# Altium PCB PCB3.PcbDoc (part 2 of 2)
Units mm, origin at the board's own origin, x right, y up, seen from the top; angles counter-clockwise.
Board outline 152.4 x 101.6 mm, 4 copper layers (Top Layer, Int1 (GND), Layer 1, Bottom Layer), stack 1.237 mm thick; 184 components, 352 nets, 1100 pads, 26 vias.
Unrouted connection lines stored in the file: 656.
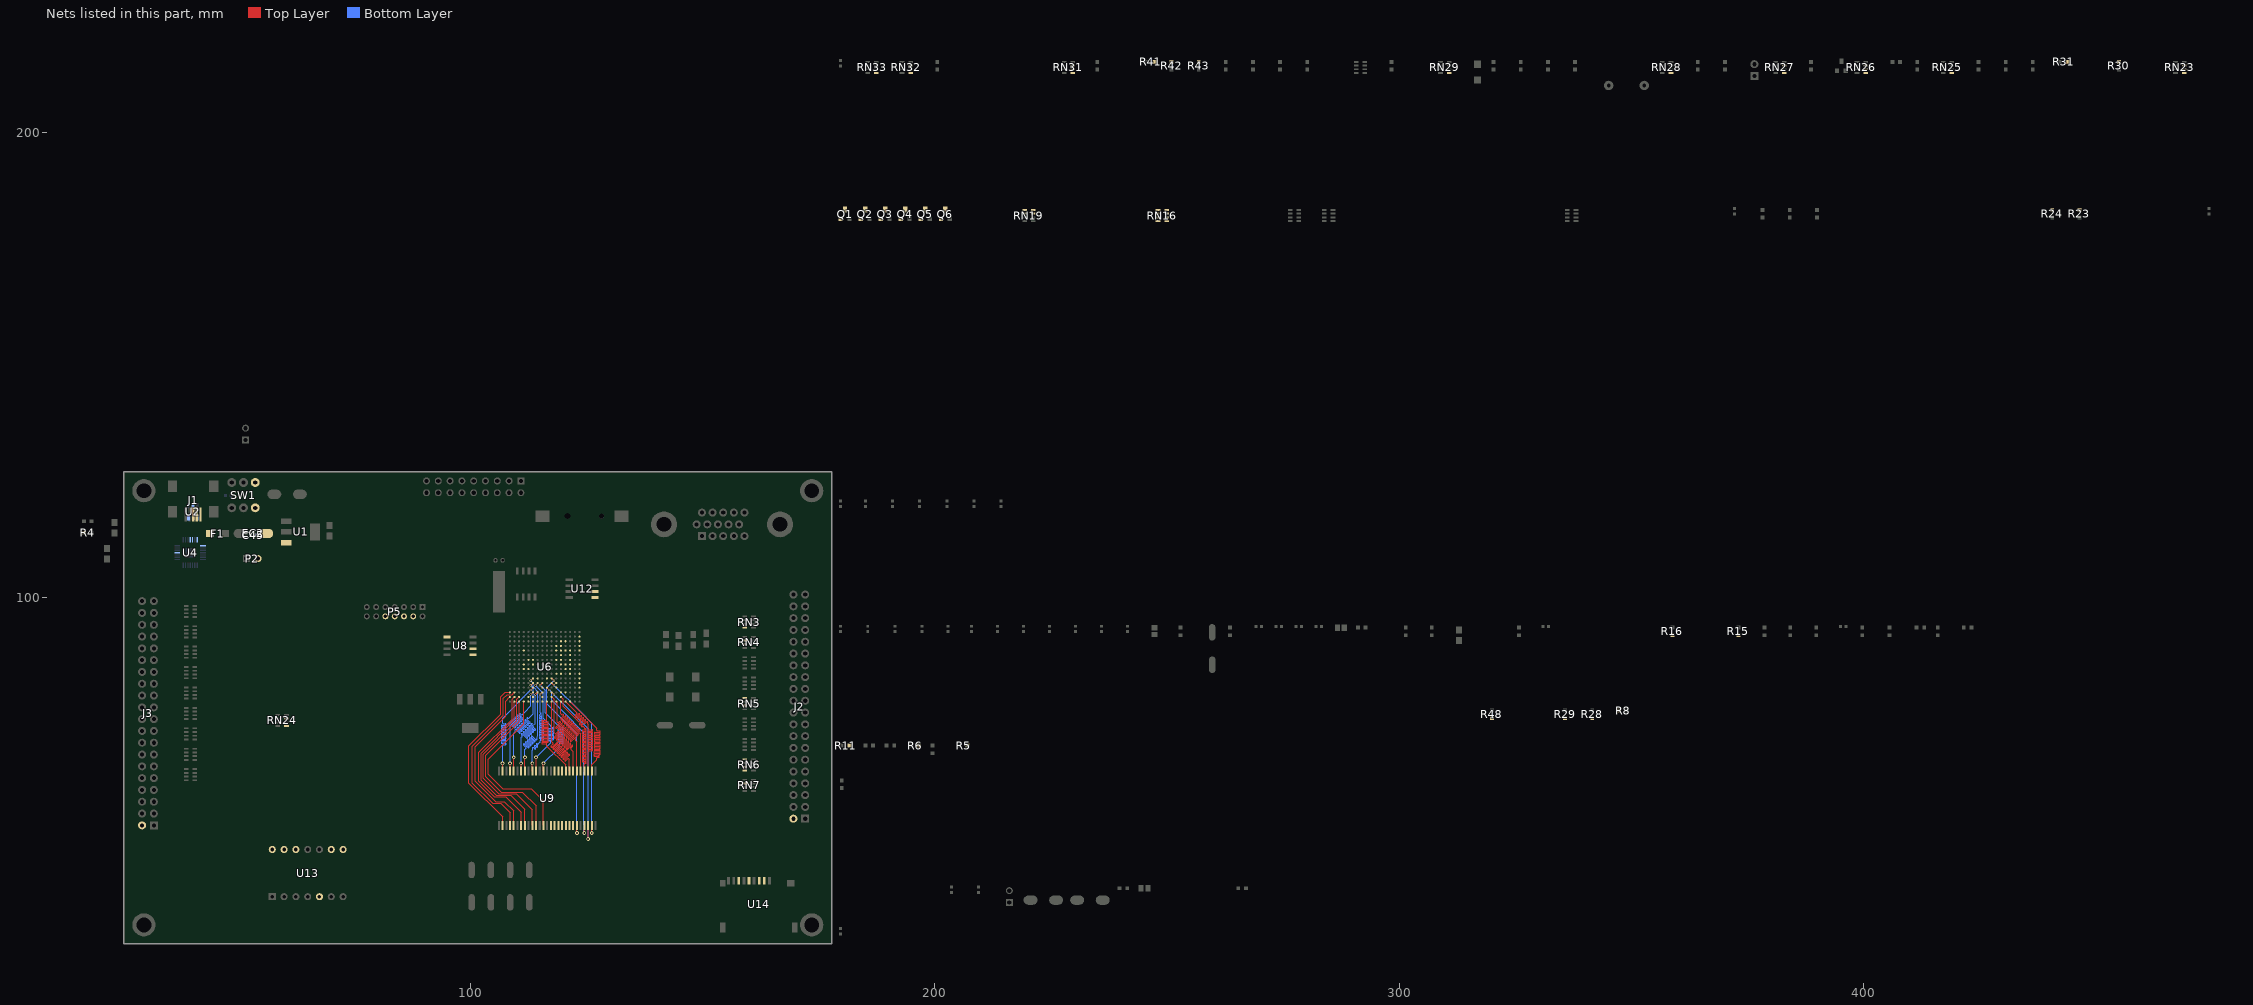
[diagram p3: the nets of this part, all layers, seen from the top]

## Via types
v1: diameter 0.8, hole 0.4, Top Layer to Bottom Layer, 13 vias
v2: diameter 0.48, hole 0.25, Top Layer to Bottom Layer, 13 vias

## Nets (pads, with @x,y where several pads share a name; then routed paths per layer and width w, separated by ;. In a path a pad name is that pad's centre, name@x,y a point inside that pad or via, vN(x,y) a via of type N, cw(c..) or ccw(c..) an arc to the next point about the centre after c; other vN are vias at no path point) (continued)
S_A1: U6.J4 U9.24 | length 36.6
  Top Layer w0.1: U6.J4@116.491,80.534 v2(116.983,80.042)
  Top Layer w0.15: v1(124.536,49.251) U9.24@124.535,50.902
  Bottom Layer w0.15: v2(116.983,80.042) 117.475,79.55 117.475,77.826 119.892,75.409 124.447,70.853 124.447,49.339 v1(124.536,49.251) v1@124.536,48.881
S_A2: U6.K3 U9.25 | length 37.8
  Top Layer w0.1: U6.K3@117.491,79.534 v2(117.983,79.042)
  Top Layer w0.15: U9.25@125.342,50.895 125.342,47.962 v1(125.349,47.955)
  Bottom Layer w0.15: v2(117.983,79.042) 121.616,75.409 125.349,71.676 v1(125.349,47.955)
S_A3: U6.K5 U9.26 | length 37.5
  Top Layer w0.1: U6.K5@117.491,81.534 v2(117.983,81.042)
  Top Layer w0.15: v1(126.136,49.251) U9.26@126.135,50.902
  Bottom Layer w0.15: v2(117.983,81.042) 123.616,75.409 126.136,72.889 v1(126.136,49.251)
S_A4: U6.P1 U9.29 | length 39.9
  Top Layer w0.15: U6.P1@121.491,77.534 127.203,71.822 127.203,71.45 127.203,71.375 ccw(c127.353,71.375) 127.353,71.225 127.812,71.225 cw(c127.812,71.075) 127.812,70.925 126.817,70.925 ccw(c126.817,70.775) 126.817,70.625 127.812,70.625 cw(c127.812,70.475) 127.812,70.325 126.817,70.325 ccw(c126.817,70.175) 126.817,70.025 127.812,70.025 cw(c127.812,69.875) 127.812,69.725 126.817,69.725 ccw(c126.817,69.575) 126.817,69.425 127.812,69.425 cw(c127.812,69.275) 127.812,69.125 126.817,69.125 ccw(c126.817,68.975) 126.817,68.825 127.812,68.825 cw(c127.812,68.675) 127.812,68.525 126.817,68.525 ccw(c126.817,68.375) 126.817,68.225 127.812,68.225 cw(c127.812,68.075) 127.812,67.925 126.817,67.925 ccw(c126.817,67.775) 126.817,67.625 127.812,67.625 cw(c127.812,67.475) 127.812,67.325 126.817,67.325 ccw(c126.817,67.175) 126.817,67.025 127.812,67.025 cw(c127.812,66.875) 127.812,66.725 126.718,66.725 ccw(c126.718,66.575) 126.718,66.425 127.812,66.425 cw(c127.812,66.275) 127.812,66.125 126.718,66.125 ccw(c126.718,65.975) 126.718,65.825 127.569,65.825 cw(c127.569,65.675) 127.569,65.525 127.353,65.525 ccw(c127.353,65.375) 127.203,65.375 127.203,65.049 126.135,63.982 U9.29@126.135,62.586
S_A5: U6.N1 U9.30 | length 39.8
  Top Layer w0.15: U6.N1@120.491,77.534 122.647,75.378 122.912,75.113 cw(c122.806,75.007) 122.912,74.9 122.584,74.572 ccw(c122.69,74.466) 122.584,74.36 ccw(c122.69,74.466) 122.796,74.36 123.337,74.9 cw(c123.443,74.794) 123.549,74.9 cw(c123.443,74.794) 123.549,74.688 123.008,74.148 ccw(c123.114,74.042) 123.008,73.936 ccw(c123.114,74.042) 123.22,73.936 123.761,74.476 cw(c123.867,74.37) 123.973,74.476 cw(c123.867,74.37) 123.973,74.264 123.601,73.892 ccw(c123.707,73.786) 123.601,73.68 ccw(c123.707,73.786) 123.813,73.68 124.185,74.052 cw(c124.291,73.946) 124.397,74.052 cw(c124.291,73.946) 124.397,73.84 124.069,73.512 ccw(c124.175,73.405) 124.069,73.299 ccw(c124.175,73.405) 124.281,73.299 124.609,73.628 cw(c124.715,73.522) 124.822,73.628 cw(c124.715,73.522) 124.822,73.416 124.493,73.087 ccw(c124.599,72.981) 124.493,72.875 ccw(c124.599,72.981) 124.705,72.875 125.034,73.203 cw(c125.14,73.097) 125.246,73.203 cw(c125.14,73.097) 125.246,72.991 ccw(c125.352,72.885) 125.246,72.779 125.335,72.69 125.335,72.524 125.335,72.388 125.335,71.653 ccw(c125.485,71.653) 125.485,71.503 126.217,71.503 cw(c126.217,71.353) 126.217,71.203 125.424,71.203 ccw(c125.424,71.053) 125.424,70.903 126.217,70.903 cw(c126.217,70.753) 126.217,70.603 125.424,70.603 ccw(c125.424,70.453) 125.424,70.303 126.217,70.303 cw(c126.217,70.153) 126.217,70.003 125.424,70.003 ccw(c125.424,69.853) 125.424,69.703 126.217,69.703 cw(c126.217,69.553) 126.217,69.403 125.424,69.403 ccw(c125.424,69.253) 125.424,69.103 126.217,69.103 cw(c126.217,68.953) 126.217,68.803 125.424,68.803 ccw(c125.424,68.653) 125.424,68.503 126.217,68.503 cw(c126.217,68.353) 126.217,68.203 125.424,68.203 ccw(c125.424,68.053) 125.424,67.903 126.217,67.903 cw(c126.217,67.753) 126.217,67.603 125.424,67.603 ccw(c125.424,67.453) 125.424,67.303 126.217,67.303 cw(c126.217,67.153) 126.217,67.003 125.485,67.003 ccw(c125.485,66.853) 125.335,66.853 125.335,66.478 U9.30@125.335,62.586
S_A6: U6.M2 U9.31 | length 38.9
  Top Layer w0.15: U6.M2@119.491,78.534 119.99,78.035 119.99,76.53 123.234,73.286 123.287,73.233 ccw(c123.393,73.339) 123.499,73.233 cw(c123.605,73.127) 123.711,73.233 cw(c123.605,73.127) 123.711,73.021 123.499,72.809 ccw(c123.605,72.703) 123.499,72.597 ccw(c123.605,72.703) 123.711,72.597 123.923,72.809 cw(c124.029,72.703) 124.135,72.809 cw(c124.029,72.703) 124.135,72.597 123.923,72.384 ccw(c124.029,72.278) 123.923,72.172 ccw(c124.029,72.278) 124.135,72.172 cw(c124.225,71.932) 124.406,72.114 124.475,72.045 124.528,71.992 124.535,71.984 124.535,71.962 124.535,71.887 ccw(c124.685,71.887) 124.685,71.737 124.824,71.737 cw(c124.824,71.587) 124.824,71.437 124.225,71.437 ccw(c124.225,71.287) 124.225,71.137 124.824,71.137 cw(c124.824,70.987) 124.824,70.837 124.225,70.837 ccw(c124.225,70.687) 124.225,70.537 124.824,70.537 cw(c124.824,70.387) 124.824,70.237 124.225,70.237 ccw(c124.225,70.087) 124.225,69.937 124.824,69.937 cw(c124.824,69.787) 124.824,69.637 124.225,69.637 ccw(c124.225,69.487) 124.225,69.337 124.824,69.337 cw(c124.824,69.187) 124.824,69.037 124.225,69.037 ccw(c124.225,68.887) 124.225,68.737 124.824,68.737 cw(c124.824,68.587) 124.824,68.437 124.225,68.437 ccw(c124.225,68.287) 124.225,68.137 124.824,68.137 cw(c124.824,67.987) 124.824,67.837 124.225,67.837 ccw(c124.225,67.687) 124.225,67.537 124.824,67.537 cw(c124.824,67.387) 124.824,67.237 124.225,67.237 ccw(c124.225,67.087) 124.225,66.937 124.824,66.937 cw(c124.824,66.787) 124.824,66.637 124.225,66.637 ccw(c124.225,66.487) 124.225,66.337 124.824,66.337 cw(c124.824,66.187) 124.824,66.037 124.225,66.037 ccw(c124.225,65.887) 124.225,65.737 124.824,65.737 cw(c124.824,65.587) 124.824,65.437 124.225,65.437 ccw(c124.225,65.287) 124.225,65.137 124.824,65.137 cw(c124.824,64.987) 124.824,64.837 124.225,64.837 ccw(c124.225,64.687) 124.225,64.537 124.824,64.537 cw(c124.824,64.387) 124.824,64.237 124.685,64.237 ccw(c124.685,64.087) 124.535,64.087 124.535,63.856 U9.31@124.535,62.586
S_A7: U6.M1 U9.32 | length 39.9
  Top Layer w0.15: 119.451,73.694 ccw(c119.557,73.8) 119.663,73.694 ; 119.451,73.694 cw(c119.557,73.8) 119.451,73.906 120.072,74.527 ccw(c119.966,74.633) 120.072,74.739 ccw(c119.966,74.633) 119.86,74.739 cw(c119.754,74.845) 119.647,74.739 119.491,74.895 119.491,75.203 U6.M1@119.491,77.534 ; 119.663,73.694 120.393,74.424 cw(c120.499,74.318) 120.605,74.424 cw(c120.499,74.318) 120.605,74.212 119.787,73.394 ccw(c119.893,73.288) 119.787,73.181 ccw(c119.893,73.288) 119.999,73.181 120.817,73.999 cw(c120.923,73.893) 121.029,73.999 cw(c120.923,73.893) 121.029,73.787 120.212,72.969 ccw(c120.318,72.863) 120.212,72.757 ccw(c120.318,72.863) 120.424,72.757 121.242,73.575 cw(c121.348,73.469) 121.454,73.575 cw(c121.348,73.469) 121.454,73.363 120.636,72.545 ccw(c120.742,72.439) 120.636,72.333 ccw(c120.742,72.439) 120.848,72.333 121.666,73.151 cw(c121.772,73.045) 121.878,73.151 cw(c121.772,73.045) 121.878,72.939 121.06,72.121 ccw(c121.166,72.015) 121.06,71.909 ccw(c121.166,72.015) 121.272,71.909 122.09,72.727 cw(c122.196,72.621) 122.302,72.727 cw(c122.196,72.621) 122.302,72.514 121.484,71.697 ccw(c121.59,71.59) 121.484,71.484 ccw(c121.59,71.59) 121.696,71.484 122.514,72.302 cw(c122.62,72.196) 122.727,72.302 cw(c122.62,72.196) 122.727,72.09 121.909,71.272 ccw(c122.015,71.166) 121.909,71.06 ccw(c122.015,71.166) 122.121,71.06 122.939,71.878 cw(c123.045,71.772) 123.151,71.878 cw(c123.045,71.772) 123.151,71.666 122.333,70.848 ccw(c122.439,70.742) 122.333,70.636 ccw(c122.439,70.742) 122.545,70.636 123.363,71.454 cw(c123.469,71.348) 123.575,71.454 cw(c123.469,71.348) 123.575,71.242 122.757,70.424 ccw(c122.863,70.318) 122.757,70.212 ccw(c122.863,70.318) 122.969,70.212 123.466,70.708 cw(c123.572,70.602) 123.678,70.708 123.731,70.655 123.735,70.651 U9.32@123.735,62.586
S_A8: U6.L1 U9.33 | length 39
  Top Layer w0.15: U6.L1@118.491,77.534 118.745,77.28 118.745,73.106 118.745,73.101 118.796,73.051 ccw(c118.902,73.157) 119.008,73.051 119.152,73.195 cw(c119.258,73.089) 119.364,73.195 cw(c119.258,73.089) 119.364,72.983 118.428,72.047 ccw(c118.534,71.941) 118.428,71.835 ccw(c118.534,71.941) 118.64,71.835 119.576,72.771 cw(c119.683,72.665) 119.789,72.771 cw(c119.682,72.665) 119.789,72.559 118.944,71.714 ccw(c119.05,71.608) 118.944,71.502 ccw(c119.05,71.608) 119.156,71.502 120.001,72.347 cw(c120.107,72.241) 120.213,72.347 cw(c120.107,72.241) 120.213,72.135 119.407,71.329 ccw(c119.514,71.223) 119.407,71.117 ccw(c119.514,71.223) 119.62,71.117 120.425,71.922 cw(c120.531,71.816) 120.637,71.922 cw(c120.531,71.816) 120.637,71.71 119.832,70.905 ccw(c119.938,70.799) 119.832,70.693 ccw(c119.938,70.799) 120.044,70.693 120.849,71.498 cw(c120.955,71.392) 121.061,71.498 cw(c120.955,71.392) 121.061,71.286 120.256,70.481 ccw(c120.362,70.375) 120.256,70.269 ccw(c120.362,70.375) 120.468,70.269 121.273,71.074 cw(c121.38,70.968) 121.486,71.074 cw(c121.38,70.968) 121.486,70.862 120.68,70.056 ccw(c120.786,69.95) 120.68,69.844 ccw(c120.786,69.95) 120.892,69.844 121.698,70.65 cw(c121.804,70.544) 121.91,70.65 cw(c121.804,70.544) 121.91,70.437 121.105,69.632 ccw(c121.211,69.526) 121.105,69.42 ccw(c121.211,69.526) 121.317,69.42 122.122,70.225 cw(c122.228,70.119) 122.334,70.225 cw(c122.228,70.119) 122.334,70.013 121.529,69.208 ccw(c121.635,69.102) 121.529,68.996 ccw(c121.635,69.102) 121.741,68.996 122.546,69.801 cw(c122.652,69.695) 122.758,69.801 cw(c122.652,69.695) 122.758,69.589 122.614,69.444 ccw(c122.72,69.338) 122.614,69.232 122.935,68.911 122.935,68.886 U9.33@122.935,62.586
S_A9: U6.K2 U9.34 | length 39.5
  Top Layer w0.15: U6.K2@117.491,78.534 118.008,78.017 118.008,70.942 118.204,70.747 118.257,70.694 ccw(c118.363,70.8) 118.469,70.694 118.832,71.057 cw(c118.938,70.95) 119.044,71.057 cw(c118.938,70.95) 119.044,70.844 118.119,69.92 ccw(c118.225,69.814) 118.119,69.708 ccw(c118.225,69.814) 118.331,69.708 119.256,70.632 cw(c119.362,70.526) 119.468,70.632 cw(c119.362,70.526) 119.468,70.42 118.544,69.496 ccw(c118.65,69.39) 118.544,69.283 ccw(c118.65,69.39) 118.756,69.283 119.68,70.208 cw(c119.786,70.102) 119.892,70.208 cw(c119.786,70.102) 119.892,69.996 118.997,69.101 ccw(c119.103,68.995) 118.997,68.889 ; 118.997,68.889 ccw(c119.103,68.995) 119.209,68.889 120.104,69.784 cw(c120.21,69.678) 120.317,69.784 cw(c120.21,69.678) 120.317,69.572 119.421,68.676 ccw(c119.527,68.57) 119.421,68.464 ccw(c119.527,68.57) 119.633,68.464 120.529,69.359 cw(c120.635,69.253) 120.741,69.359 cw(c120.635,69.253) 120.741,69.147 119.846,68.252 ccw(c119.952,68.146) 119.846,68.04 ccw(c119.952,68.146) 120.058,68.04 120.953,68.935 cw(c121.059,68.829) 121.165,68.935 cw(c121.059,68.829) 121.165,68.723 120.27,67.828 ccw(c120.376,67.722) 120.27,67.616 ccw(c120.376,67.722) 120.482,67.616 121.377,68.511 cw(c121.483,68.405) 121.589,68.511 cw(c121.483,68.405) 121.589,68.299 120.694,67.404 ccw(c120.8,67.298) 120.694,67.191 ccw(c120.8,67.298) 120.906,67.191 121.801,68.087 cw(c121.908,67.981) 122.014,68.087 cw(c121.908,67.981) 122.014,67.875 121.651,67.512 ccw(c121.757,67.406) 121.651,67.3 121.945,67.005 122.137,66.813 U9.34@122.137,62.586
S_A10: U6.K6 U9.22 | length 38.5
  Top Layer w0.1: U6.K6@117.491,82.534 v2(117.983,82.042)
  Top Layer w0.15: v1(122.936,49.251) U9.22@122.935,50.902
  Bottom Layer w0.15: v2(117.983,82.042) 116.408,80.467 116.408,77.038 118.037,75.409 122.936,70.51 v1(122.936,49.251)
S_A11: U6.K1 U9.35 | length 39
  Top Layer w0.15: U6.K1@117.491,77.534 117.491,68.869 117.496,68.864 117.781,68.579 cw(c117.675,68.473) 117.781,68.367 117.389,67.976 ccw(c117.495,67.869) 117.389,67.763 ccw(c117.495,67.869) 117.602,67.763 118.544,68.706 cw(c118.65,68.599) 118.756,68.706 cw(c118.65,68.599) 118.756,68.493 117.814,67.551 ccw(c117.92,67.445) 117.814,67.339 ccw(c117.92,67.445) 118.026,67.339 118.968,68.281 cw(c119.074,68.175) 119.18,68.281 cw(c119.074,68.175) 119.18,68.069 118.238,67.127 ccw(c118.344,67.021) 118.238,66.915 ccw(c118.344,67.021) 118.45,66.915 119.392,67.857 cw(c119.498,67.751) 119.604,67.857 cw(c119.498,67.751) 119.604,67.645 118.662,66.703 ccw(c118.768,66.597) 118.662,66.491 ccw(c118.768,66.597) 118.874,66.491 119.816,67.433 cw(c119.923,67.327) 120.029,67.433 cw(c119.923,67.327) 120.029,67.221 119.086,66.278 ccw(c119.193,66.172) 119.086,66.066 ccw(c119.193,66.172) 119.299,66.066 120.241,67.008 cw(c120.347,66.902) 120.453,67.008 cw(c120.347,66.902) 120.453,66.796 119.511,65.854 ccw(c119.617,65.748) 119.511,65.642 ccw(c119.617,65.748) 119.723,65.642 120.665,66.584 cw(c120.771,66.478) 120.877,66.584 cw(c120.771,66.478) 120.877,66.372 119.935,65.43 ccw(c120.041,65.324) 119.935,65.218 ccw(c120.041,65.324) 120.147,65.218 121.089,66.16 cw(c121.195,66.054) 121.301,66.16 cw(c121.195,66.054) 121.301,65.948 120.359,65.006 ccw(c120.465,64.9) 120.359,64.794 ccw(c120.465,64.9) 120.571,64.794 120.963,65.185 cw(c121.069,65.079) 121.175,65.185 121.228,65.132 121.335,65.024 U9.35@121.335,62.586
S_A12: U6.J1 U9.36 | length 39.5
  Top Layer w0.15: U6.J1@116.491,77.534 116.491,74.498 116.491,73.699 cw(c116.341,73.699) 116.341,73.549 115.51,73.549 ccw(c115.51,73.399) 115.51,73.249 116.641,73.249 cw(c116.641,73.099) 116.641,72.949 115.51,72.949 ccw(c115.51,72.799) 115.51,72.649 116.641,72.649 cw(c116.641,72.499) 116.641,72.349 115.51,72.349 ccw(c115.51,72.199) 115.51,72.049 116.641,72.049 cw(c116.641,71.899) 116.641,71.749 115.51,71.749 ccw(c115.51,71.599) 115.51,71.449 116.641,71.449 cw(c116.641,71.299) 116.641,71.149 115.51,71.149 ccw(c115.51,70.999) 115.51,70.849 116.641,70.849 cw(c116.641,70.699) 116.641,70.549 115.51,70.549 ccw(c115.51,70.399) 115.51,70.249 116.641,70.249 cw(c116.641,70.099) 116.641,69.949 115.51,69.949 ccw(c115.51,69.799) 115.51,69.649 116.641,69.649 cw(c116.641,69.499) 116.641,69.349 115.51,69.349 ccw(c115.51,69.199) 115.51,69.049 116.641,69.049 cw(c116.641,68.899) 116.641,68.749 115.51,68.749 ccw(c115.51,68.599) 115.51,68.449 116.341,68.449 cw(c116.341,68.299) 116.491,68.299 116.491,68.224 116.491,67.938 120.535,63.894 U9.36@120.535,62.586
S_BA0: U6.G6 U9.20
S_BA1: U6.J6 U9.21
S_CKE: U6.H2 U9.37
S_CLK: U6.H4 U9.38
S_DB0: U6.A3 U9.2 | length 35.9
  Top Layer w0.15: U9.2@106.935,50.902 106.935,52.729 99.67,59.995 99.67,67.996 106.502,74.828 106.502,74.854 106.502,78.562 107.474,79.534 U6.A3@108.491,79.534
S_DB1: U6.B3 U9.4 | length 37.4
  Top Layer w0.15: U9.4@108.535,50.902 108.535,53.618 106.493,55.661 104.765,55.661 100.432,59.995 100.432,67.932 107.086,74.586 107.086,74.854 107.086,78.232 107.899,79.045 109.002,79.045 U6.B3@109.491,79.534
S_DB2: U6.A2 U9.5 | length 35.3
  Top Layer w0.15: U6.A2@108.491,78.534 107.594,77.637 107.594,74.854 107.594,74.376 101.041,67.823 101.041,60.401 105.422,56.02 107.302,56.02 109.335,53.987 U9.5@109.335,50.902
S_DB3: U6.B2 U9.7 | length 36
  Top Layer w0.15: U6.B2@109.491,78.534 109.007,78.05 109.007,74.854 109.007,73.791 101.809,66.592 101.809,60.396 105.185,57.019 107.649,57.019 110.935,53.733 U9.7@110.935,50.902
S_DB4: U6.B1 U9.8 | length 35.4
  Top Layer w0.15: U6.B1@109.491,77.534 109.491,74.854 109.491,73.59 102.292,66.392 102.292,60.623 105.554,57.361 108.729,57.361 111.735,54.355 U9.8@111.735,50.902
S_DB5: U6.C2 U9.10 | length 37.3
  Top Layer w0.15: U6.C2@110.491,78.534 110.007,78.05 110.007,74.854 110.007,73.376 102.809,66.178 102.809,61.072 106.154,57.727 109.837,57.727 113.335,54.228 U9.10@113.335,50.902
S_DB6: U6.C1 U9.11 | length 36.8
  Top Layer w0.15: U6.C1@110.491,77.534 110.491,74.854 110.491,73.176 103.292,65.978 103.292,61.376 106.6,58.068 111.172,58.068 114.136,55.104 U9.11@114.136,50.902
S_DB7: U6.D1 U9.13 | length 38.3
  Top Layer w0.15: U6.D1@111.491,77.534 111.491,74.854 111.491,72.762 103.81,65.081 103.81,61.951 106.985,58.776 113.106,58.776 115.735,56.146 U9.13@115.735,50.902
S_DB8: U6.H5 U9.42 | length 34.4
  Top Layer w0.1: v2(114.999,81.042) U6.H5@115.491,81.534
  Top Layer w0.15: U9.42@115.735,62.586 v1(115.736,64.236)
  Bottom Layer w0.15: v2(114.999,81.042) 116.108,79.933 116.108,75.128 119.151,72.085 119.151,72.01 ccw(c119.301,72.01) 119.301,71.86 119.892,71.86 cw(c119.892,71.71) 119.892,71.56 119.001,71.56 ccw(c119.001,71.41) 119.001,71.26 119.892,71.26 cw(c119.892,71.11) 119.892,70.96 119.001,70.96 ccw(c119.001,70.81) 119.001,70.66 119.892,70.66 cw(c119.892,70.51) 119.892,70.36 119.001,70.36 ccw(c119.001,70.21) 119.001,70.06 119.892,70.06 cw(c119.892,69.91) 119.892,69.76 119.001,69.76 ccw(c119.001,69.61) 119.001,69.46 119.892,69.46 cw(c119.892,69.31) 119.892,69.16 119.001,69.16 ccw(c119.001,69.01) 119.001,68.86 119.892,68.86 cw(c119.892,68.71) 119.892,68.56 119.301,68.56 ccw(c119.301,68.41) 119.151,68.41 119.151,67.945 119.151,67.652 v1(115.736,64.236)
S_DB9: U6.G5 U9.44 | length 33.6
  Top Layer w0.1: v2(113.999,81.042) U6.G5@114.491,81.534
  Top Layer w0.15: U9.44@114.136,62.586 114.142,62.592 114.142,65.525 v1(114.149,65.532)
  Bottom Layer w0.15: v2(113.999,81.042) 115.697,79.344 115.697,73.939 117.272,72.365 117.272,72.288 117.272,72.213 ccw(c117.422,72.213) 117.422,72.063 117.792,72.063 cw(c117.792,71.913) 117.792,71.763 116.77,71.763 ccw(c116.77,71.613) 116.77,71.463 117.792,71.463 cw(c117.792,71.313) 117.792,71.163 116.77,71.163 ccw(c116.77,71.013) 116.77,70.863 117.792,70.863 cw(c117.792,70.713) 117.792,70.563 116.77,70.563 ccw(c116.77,70.413) 116.77,70.263 117.792,70.263 cw(c117.792,70.113) 117.792,69.963 116.77,69.963 ccw(c116.77,69.813) 116.77,69.663 117.792,69.663 cw(c117.792,69.513) 117.792,69.363 116.77,69.363 ccw(c116.77,69.213) 116.77,69.063 117.122,69.063 cw(c117.122,68.913) 117.272,68.913 117.272,68.655 117.16,68.543 v1(114.149,65.532)
S_DB10: U6.H3 U9.45 | length 34.7
  Top Layer w0.1: v2(114.999,79.042) U6.H3@115.491,79.534
  Top Layer w0.15: U9.45@113.335,62.586 v1(113.336,64.237)
  Bottom Layer w0.15: v1(113.336,64.237) 113.336,67.108 113.389,67.161 ccw(c113.283,67.267) 113.389,67.373 cw(c113.495,67.479) 113.389,67.585 cw(c113.495,67.479) 113.601,67.585 113.813,67.373 ccw(c113.919,67.479) 114.025,67.373 ccw(c113.919,67.479) 114.025,67.585 113.813,67.797 cw(c113.919,67.904) 113.813,68.01 cw(c113.919,67.904) 114.025,68.01 114.238,67.797 ccw(c114.344,67.904) 114.45,67.797 ccw(c114.344,67.904) 114.45,68.01 114.238,68.222 cw(c114.344,68.328) 114.238,68.434 cw(c114.344,68.328) 114.45,68.434 ccw(c114.556,68.54) 114.662,68.434 114.967,68.739 114.999,68.771 114.999,69.146 cw(c115.149,69.146) 115.149,69.296 115.695,69.296 ccw(c115.695,69.446) 115.695,69.596 114.951,69.596 cw(c114.951,69.746) 114.951,69.896 115.695,69.896 ccw(c115.695,70.046) 115.695,70.196 114.984,70.196 cw(c114.984,70.346) 114.984,70.496 115.695,70.496 ccw(c115.695,70.646) 115.695,70.796 114.984,70.796 cw(c114.984,70.946) 114.984,71.096 115.695,71.096 ccw(c115.695,71.246) 115.695,71.396 114.984,71.396 cw(c114.984,71.546) 114.984,71.696 115.695,71.696 ccw(c115.695,71.846) 115.695,71.996 114.984,71.996 cw(c114.984,72.146) 114.984,72.296 115.695,72.296 ccw(c115.695,72.446) 115.695,72.596 114.984,72.596 cw(c114.984,72.746) 114.984,72.896 115.695,72.896 ccw(c115.695,73.046) 115.695,73.196 114.984,73.196 cw(c114.984,73.346) 114.984,73.496 115.283,73.496 ccw(c115.283,73.646) 115.283,73.796 114.984,73.796 cw(c114.984,73.946) 114.984,74.096 115.247,74.096 ccw(c115.247,74.246) 115.247,74.396 114.984,74.396 cw(c114.984,74.546) 114.984,74.696 115.162,74.696 ccw(c115.162,74.846) 115.162,74.996 115.149,74.996 cw(c115.149,75.146) 114.999,75.146 114.999,75.409 v2(114.999,79.042)
S_DB11: U6.F6 U9.47 | length 33.6
  Top Layer w0.1: v2(112.999,82.042) U6.F6@113.491,82.534
  Top Layer w0.15: U9.47@111.735,62.586 111.742,62.592 111.742,65.525 v1(111.749,65.532)
  Bottom Layer w0.15: v1(111.749,65.532) 111.749,67.248 111.912,67.412 111.965,67.465 ccw(c111.859,67.571) 111.965,67.677 111.462,68.181 cw(c111.568,68.287) 111.462,68.393 cw(c111.568,68.287) 111.674,68.393 112.39,67.677 ccw(c112.496,67.783) 112.602,67.677 ccw(c112.496,67.783) 112.602,67.889 111.886,68.605 cw(c111.992,68.711) 111.886,68.817 cw(c111.992,68.711) 112.098,68.817 112.814,68.101 ccw(c112.92,68.207) 113.026,68.101 ccw(c112.92,68.207) 113.026,68.313 112.31,69.029 cw(c112.416,69.135) 112.31,69.241 cw(c112.416,69.135) 112.522,69.241 113.238,68.525 ccw(c113.344,68.631) 113.45,68.525 ccw(c113.344,68.631) 113.45,68.737 112.734,69.453 cw(c112.84,69.559) 112.734,69.666 cw(c112.84,69.559) 112.947,69.666 113.662,68.95 ccw(c113.769,69.056) 113.875,68.95 ccw(c113.769,69.056) 113.875,69.162 113.159,69.878 cw(c113.265,69.984) 113.159,70.09 cw(c113.265,69.984) 113.371,70.09 114.087,69.374 ccw(c114.193,69.48) 114.299,69.374 ccw(c114.193,69.48) 114.299,69.586 cw(c114.539,69.676) 114.357,69.856 114.534,70.033 114.534,79.235 114.554,79.255 114.554,79.68 113.533,80.7 113.533,81.508 v2(112.999,82.042)
S_DB12: U6.G3 U9.48 | length 33.6
  Top Layer w0.1: v2(113.999,79.042) U6.G3@114.491,79.534
  Top Layer w0.15: U9.48@110.935,62.586 v1@110.936,64.236
  Bottom Layer w0.15: v1(110.936,64.237) 110.936,69.813 111.087,69.964 111.14,70.017 ccw(c111.034,70.123) 111.14,70.229 110.964,70.405 cw(c111.07,70.511) 110.964,70.617 cw(c111.07,70.511) 111.176,70.617 112.069,69.725 ccw(c112.175,69.831) 112.281,69.725 ccw(c112.175,69.831) 112.281,69.937 111.388,70.83 cw(c111.495,70.936) 111.388,71.042 cw(c111.495,70.936) 111.601,71.042 112.493,70.149 ccw(c112.599,70.255) 112.705,70.149 ccw(c112.599,70.255) 112.705,70.361 111.813,71.254 cw(c111.919,71.36) 111.813,71.466 cw(c111.919,71.36) 112.025,71.466 112.917,70.573 ccw(c113.023,70.68) 113.129,70.573 ccw(c113.023,70.68) 113.129,70.786 112.237,71.678 cw(c112.343,71.784) 112.237,71.89 cw(c112.343,71.784) 112.449,71.89 113.341,70.998 ccw(c113.448,71.104) 113.554,70.998 ccw(c113.448,71.104) 113.554,71.21 112.661,72.102 cw(c112.767,72.208) 112.661,72.314 cw(c112.767,72.208) 112.873,72.314 113.766,71.422 ccw(c113.872,71.528) 113.978,71.422 ccw(c113.872,71.528) 113.978,71.634 113.085,72.527 cw(c113.192,72.633) 113.085,72.739 cw(c113.192,72.633) 113.298,72.739 113.473,72.563 ccw(c113.579,72.669) 113.686,72.563 113.94,72.817 113.999,72.876 v2(113.999,79.042)
S_DB13: U6.F5 U9.50 | length 34.6
  Top Layer w0.1: v2(112.999,81.042) U6.F5@113.491,81.534
  Top Layer w0.15: U9.50@109.336,62.586 109.342,62.592 109.342,65.525 v1(109.349,65.532)
  Bottom Layer w0.15: v1(109.349,65.532) 109.349,70.741 109.576,70.968 109.629,71.021 ccw(c109.523,71.127) 109.629,71.233 cw(c109.735,71.339) 109.629,71.445 cw(c109.735,71.339) 109.841,71.445 110.498,70.788 ccw(c110.604,70.894) 110.71,70.788 ccw(c110.604,70.894) 110.71,71 110.053,71.657 cw(c110.159,71.763) 110.053,71.869 cw(c110.159,71.763) 110.265,71.869 110.922,71.212 ccw(c111.028,71.318) 111.134,71.212 ccw(c111.028,71.318) 111.134,71.424 110.477,72.081 cw(c110.583,72.187) 110.477,72.293 cw(c110.583,72.187) 110.689,72.293 111.347,71.636 ccw(c111.453,71.742) 111.559,71.636 ccw(c111.453,71.742) 111.559,71.848 110.901,72.506 cw(c111.007,72.612) 110.901,72.718 cw(c111.007,72.612) 111.114,72.718 111.771,72.06 ccw(c111.877,72.166) 111.983,72.06 ccw(c111.877,72.166) 111.983,72.273 111.326,72.93 cw(c111.432,73.036) 111.326,73.142 cw(c111.432,73.036) 111.538,73.142 112.195,72.485 ccw(c112.301,72.591) 112.407,72.485 ccw(c112.301,72.591) 112.407,72.697 111.75,73.354 cw(c111.856,73.46) 111.75,73.566 cw(c111.856,73.46) 111.962,73.566 112.619,72.909 ccw(c112.725,73.015) 112.831,72.909 ccw(c112.725,73.015) 112.831,73.121 112.174,73.778 cw(c112.28,73.884) 112.174,73.99 cw(c112.28,73.884) 112.386,73.99 ccw(c112.492,74.097) 112.598,73.99 112.78,74.172 113.487,74.879 113.487,80.289 113.283,80.493 113.283,80.758 v2(112.999,81.042)
S_DB14: U6.F3 U9.51 | length 34.7
  Top Layer w0.1: v2(112.999,79.042) U6.F3@113.491,79.534
  Top Layer w0.15: U9.51@108.536,62.586 v1(108.536,64.237)
  Bottom Layer w0.15: v1(108.536,64.237) 108.536,72.138 108.589,72.191 ccw(c108.483,72.297) 108.589,72.403 108.345,72.647 cw(c108.451,72.754) 108.345,72.86 cw(c108.451,72.754) 108.557,72.86 109.482,71.934 ccw(c109.588,72.041) 109.694,71.934 ccw(c109.588,72.041) 109.694,72.147 108.769,73.072 cw(c108.875,73.178) 108.769,73.284 cw(c108.875,73.178) 108.981,73.284 109.906,72.359 ccw(c110.012,72.465) 110.118,72.359 ccw(c110.012,72.465) 110.118,72.571 109.193,73.496 cw(c109.299,73.602) 109.193,73.708 cw(c109.299,73.602) 109.405,73.708 110.33,72.783 ccw(c110.436,72.889) 110.542,72.783 ccw(c110.436,72.889) 110.542,72.995 109.617,73.92 cw(c109.723,74.026) 109.617,74.132 cw(c109.723,74.026) 109.83,74.132 110.755,73.207 ccw(c110.861,73.313) 110.967,73.207 ccw(c110.861,73.313) 110.967,73.419 110.042,74.344 cw(c110.148,74.451) 110.042,74.557 cw(c110.148,74.451) 110.254,74.557 111.179,73.632 ccw(c111.285,73.738) 111.391,73.632 ccw(c111.285,73.738) 111.391,73.844 110.524,74.711 cw(c110.63,74.817) 110.524,74.923 cw(c110.63,74.817) 110.736,74.923 110.922,74.736 ccw(c111.029,74.842) 111.135,74.736 111.785,75.387 112.999,76.601 v2(112.999,79.042)
S_DB15: U6.F4 U9.53 | length 34.6
  Top Layer w0.1: v2(112.999,80.042) U6.F4@113.491,80.534
  Top Layer w0.15: U9.53@106.935,62.586 v1(106.936,64.236)
  Bottom Layer w0.15: v1(106.936,64.236) 106.936,67.742 106.936,68.117 cw(c107.086,68.117) 107.086,68.267 107.52,68.267 ccw(c107.52,68.417) 107.52,68.567 106.786,68.567 cw(c106.786,68.717) 106.786,68.867 107.52,68.867 ccw(c107.52,69.017) 107.52,69.167 106.786,69.167 cw(c106.786,69.317) 106.786,69.467 107.52,69.467 ccw(c107.52,69.617) 107.52,69.767 106.786,69.767 cw(c106.786,69.917) 106.786,70.067 107.52,70.067 ccw(c107.52,70.217) 107.52,70.367 106.786,70.367 cw(c106.786,70.517) 106.786,70.667 107.52,70.667 ccw(c107.52,70.817) 107.52,70.967 106.786,70.967 cw(c106.786,71.117) 106.786,71.267 107.52,71.267 ccw(c107.52,71.417) 107.52,71.567 106.786,71.567 cw(c106.786,71.717) 106.786,71.867 107.52,71.867 ccw(c107.52,72.017) 107.52,72.167 106.786,72.167 cw(c106.786,72.317) 106.786,72.467 107.52,72.467 ccw(c107.52,72.617) 107.52,72.767 107.086,72.767 cw(c107.086,72.917) 106.936,72.917 106.936,73.558 106.936,73.979 v2(112.999,80.042)
S_DQM0: U6.E2 U9.15
S_DQM1: U6.H1 U9.39
S_nCAS: U6.F2 U9.17
S_nCS: U6.G1 U9.19
S_nRAS: U6.F1 U9.18
S_nWE: U6.E1 U9.16
SCL: R23.2 U6.N12 U12.6
SD_CLK: U6.M3 U14.5
SD_DIN: R43.2 U6.L5 U14.3
SD_DOUT: R41.2 U6.L4 U14.7
SD_NCS: R42.2 U6.N3 U14.2
SDA: R24.2 U6.P12 U12.5
SEL0: RN19.7 U6.D8
SEL0_T: Q6.1 RN19.2
SEL0_TT: Q6.3 U13.5
SEL1: RN19.8 U6.E8
SEL1_T: Q5.1 RN19.1
SEL1_TT: Q5.3 U13.8
SEL2: RN16.5 U6.F9
SEL2_T: Q4.1 RN16.4
SEL2_TT: Q4.3 U13.9
SEL3: RN16.6 U6.F10
SEL3_T: Q3.1 RN16.3
SEL3_TT: Q3.3 U13.12
SEL4: RN16.7 U6.E10
SEL4_T: Q2.1 RN16.2
SEL4_TT: Q2.3 U13.13
SEL5: RN16.8 U6.D9
SEL5_T: Q1.1 RN16.1
SEL5_TT: Q1.3 U13.14
SPI_CLK: R5.2 U8.6
SPI_CS_N: R11.2 R15.1 U8.1
SPI_DIN: R6.2 U8.5
SPI_DOUT: R16.1 U6.P10
T4: RN7.2 U6.T4
T5: RN6.4 U6.T5
T6: RN6.3 U6.T6
T7: RN6.1 U6.T7
T9: RN5.3 U6.T9
T12: RN5.1 U6.T12
T13: RN4.3 U6.T13
T14: RN4.2 U6.T14
T15: RN3.4 U6.T15
TCK: P5.6 R28.1
TDI: P5.10 R48.1
TDO: P5.8 R29.1
TMS: P5.4 R8.1
TXD: R4.1 U4.25 U6.D12
USB_N: J1.2 U2.3 U4.5
USB_P: J1.3 U2.1 U4.4
VBUS: F1.1 J1.1 U2.5
VCC: C45.1 EC2.1 J2.2 J3.2 P2.2 SW1.3 SW1.6 U1.3 U4.7 U4.8
VGA_HSYNC: R30.2 U6.M14
VGA_VSYNC: R31.2 U6.L13
VGAD0: RN33.5 U6.P7
VGAD1: RN32.7 U6.M7
VGAD2: RN32.5 U6.P8
VGAD3: RN31.7 U6.N8
VGAD4: RN31.5 RN31.6 U6.L7
VGAD5: RN29.5 U6.M9
VGAD6: RN28.5 U6.N9
VGAD7: RN27.7 U6.P9
VGAD8: RN27.5 U6.L10
VGAD9: RN26.7 U6.M10
VGAD10: RN26.5 RN26.6 U6.P11
VGAD11: RN25.5 U6.M11
VGAD12: RN24.7 U6.M12
VGAD13: RN24.5 U6.L12
VGAD14: RN23.7 U6.N14
VGAD15: RN23.5 RN23.6 U6.M13
pads on no net: J1.4 J1.6 J1.7 J1.8 J1.9 J4.4 J4.9 J4.11 J4.12 J4.15 J4.16 J4.17 P5.12 P5.14 RN9.3 RN9.4 RN9.5 RN9.6 RN11.1 RN11.2 RN11.7 RN11.8 RN19.3 RN19.4 RN19.5 RN19.6 RN23.1 RN23.8 RN24.3 RN24.6 RN26.1 RN26.8 RN27.3 RN27.6 RN31.1 RN31.8 RN32.3 RN32.6 SW1.1 SW1.4 U2.4 U2.6 U4.0 U4.1 U4.2 U4.10 U4.11 U4.12 U4.13 U4.14 U4.15 U4.16 U4.17 U4.18 U4.19 U4.20 U4.21 U4.22 U4.23 U4.24 U4.27 U4.28 U6.K11 U9.40 U10.0 U14.10 Y1.0

## Polygon pours and split planes (outlines as drawn)
GND on Int1 (GND) (split plane): 177.29,25.91 25.91,25.91 25.91,126.49 177.29,126.49

## Other copper
Top Layer:
  region net VCC: 52.756,120.015 cw(c52.781,120.015) 52.781,120.04 56.337,120.04 cw(c56.337,118.796) 57.582,118.796 57.582,113.741 cw(c56.642,113.741) 56.642,112.801 54.28,112.801 cw(c54.28,113.792) 53.289,113.792 cw(c54.577,115.08) 52.756,115.08 52.756,119.99
  region net VCC: 53.696,125.628 cw(c53.696,124.739) 54.585,124.739 54.585,119.101 cw(c53.848,119.101) 53.848,118.364 53.619,118.364 cw(c53.619,119.228) 52.756,119.228 52.756,124.663 cw(c53.721,124.663) 53.721,125.628
  region net NetF1_2: 51.156,125.628 cw(c51.156,124.739) 52.045,124.739 52.045,119.101 cw(c51.308,119.101) 51.308,118.364 51.079,118.364 cw(c51.079,119.228) 50.216,119.228 50.216,124.663 cw(c51.181,124.663) 51.181,125.628
  region net VBUS: 44.653,115.646 ccw(c44.018,115.646) 44.018,116.281 43.383,116.281 cw(c43.383,116.865) 42.799,116.865 42.799,118.872 ccw(c42.266,118.872) 42.266,119.405 42.113,119.405 ccw(c42.113,118.948) 41.656,118.948 41.656,116.332 ccw(c41.859,116.332) 41.859,116.129 cw(c41.859,114.986) 43.002,114.986 43.002,113.309 ccw(c43.51,113.309) 43.51,112.801 44.221,112.801 ccw(c44.221,113.233) 44.653,113.233
Bottom Layer:
  region net VCC: 53.696,125.628 cw(c53.696,124.739) 54.585,124.739 54.585,119.101 cw(c53.848,119.101) 53.848,118.364 53.619,118.364 cw(c53.619,119.228) 52.756,119.228 52.756,124.663 cw(c53.721,124.663) 53.721,125.628
  region net NetF1_2: 51.156,125.628 cw(c51.156,124.739) 52.045,124.739 52.045,119.101 cw(c51.308,119.101) 51.308,118.364 51.079,118.364 cw(c51.079,119.228) 50.216,119.228 50.216,124.663 cw(c51.181,124.663) 51.181,125.628

## Silkscreen, mask and mechanical layers (free items; w line width, h text height)
Mechanical 1:
  the board outline again, w0.254

## Text inside footprints (layer, text, board x,y; h text height)
J5: Top Overlay "18" at 88.519,123.012 h1.27 r180; Top Overlay "17" at 88.519,125.552 h1.27 r180; Top Overlay "1" at 113.411,125.552 h1.27 r180; Top Overlay "2" at 113.919,123.012 h1.27 r180